# EAGLE board NES2FPGA (EAGLE 7.6.0)
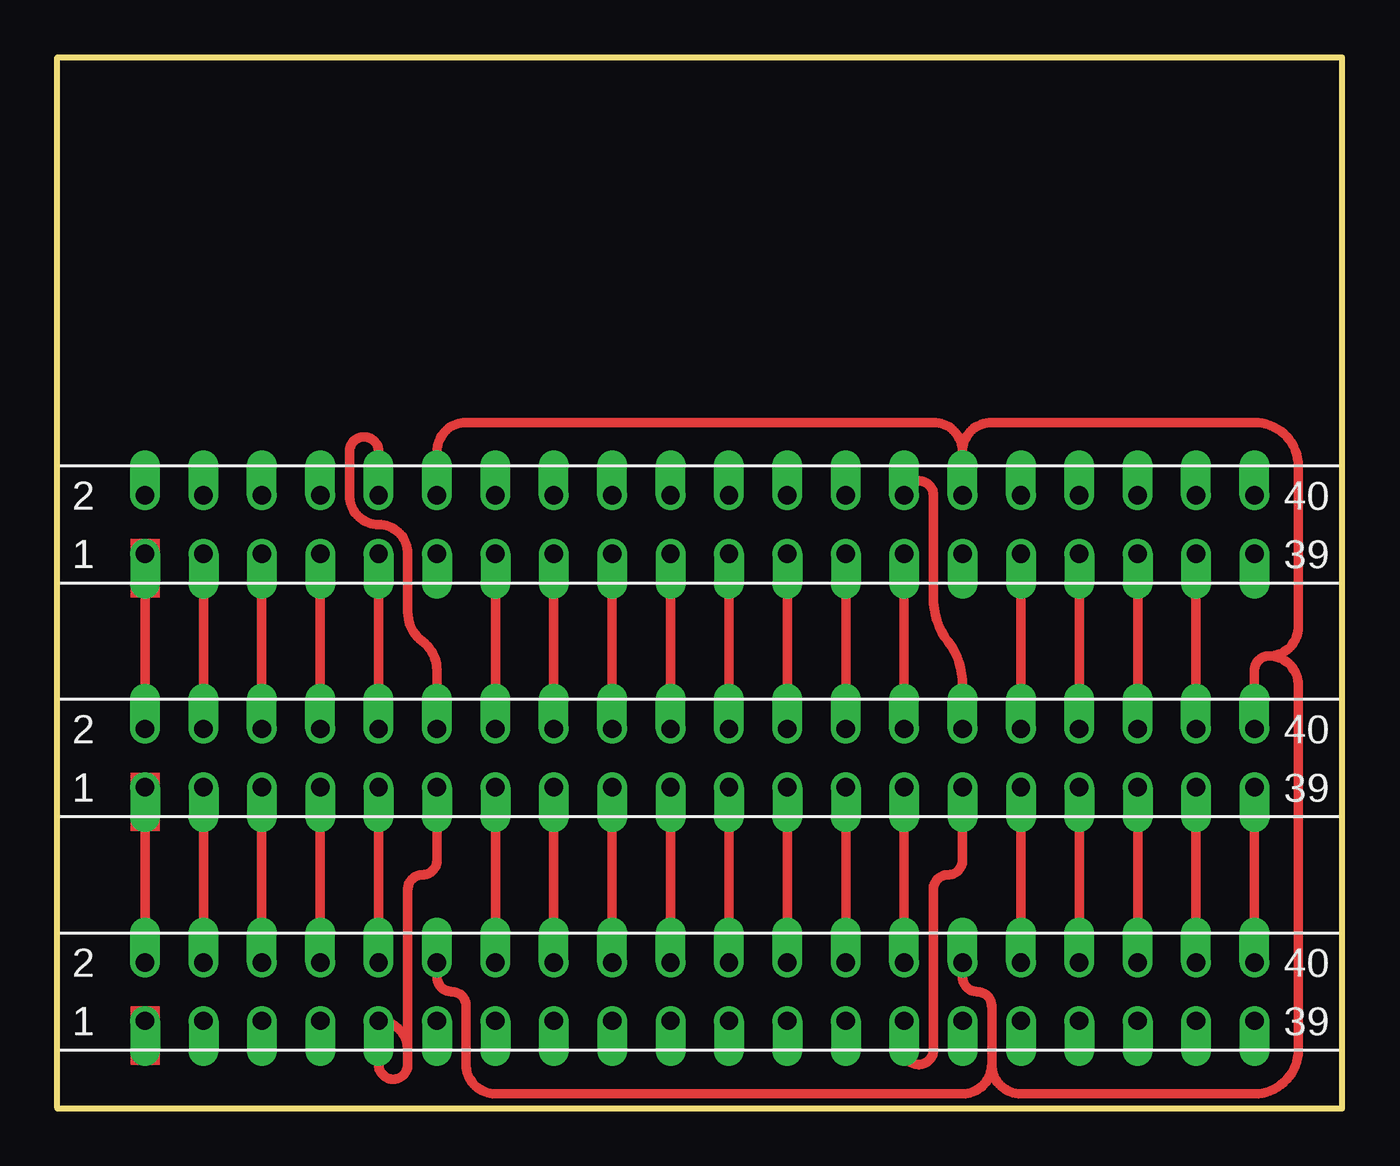
[diagram p0: board, top side]
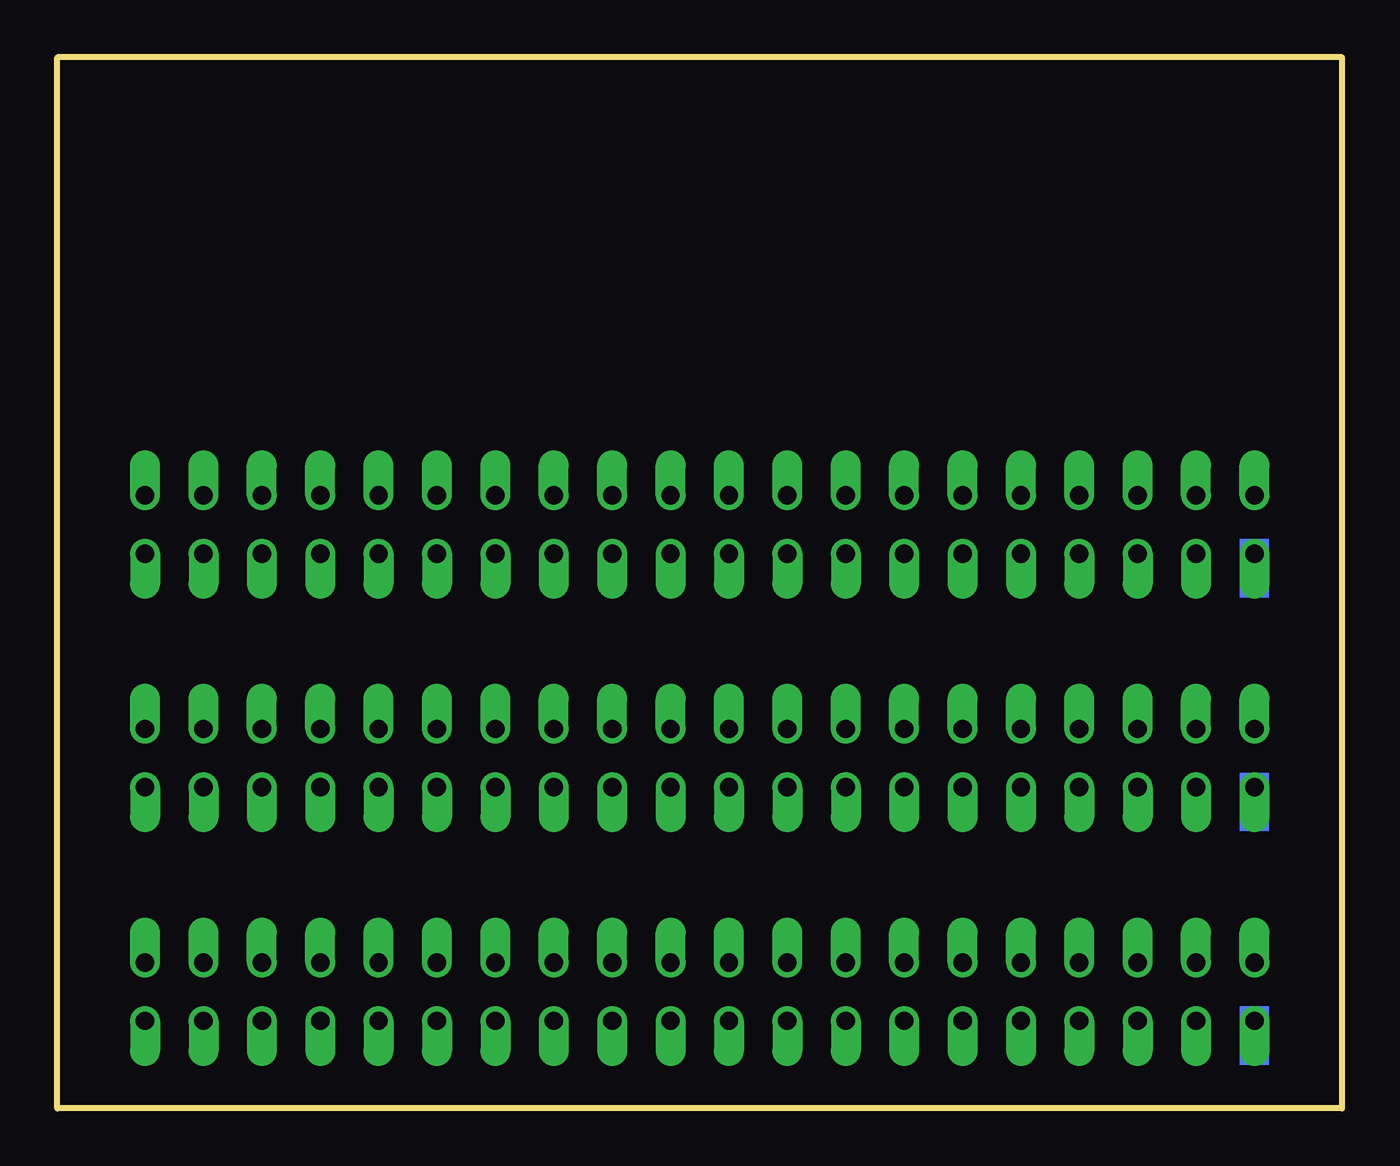
[diagram p1: board, bottom side, seen from below]

Size 55.88 x 45.72 mm. Coordinates in mm from the lower left corner, seen from the top.
Outline: 0,0 55.88,0 55.88,45.72 0,45.72 0,0
Copper layers (1*16): Top 0.035mm / dielectric 1.5mm / Bottom 0.035mm
Design rules "default": minimum track width 10mil, minimum drill 24mil, track to track 8mil, track to pad 8mil, pad to pad 8mil, via to via 8mil, smd to smd 8mil, copper to edge 40mil, drill to drill 8mil, minimum pad ring 10mil, minimum via ring 8mil, stop-mask expansion 4mil, vias tented up to drill 0mil, thermal gap 10mil

## Footprints (pad centres in the part's own frame; a part is rotated, then mirrored left to right if it is on the bottom)
40PINNER = drill 0.8 offset: P$1 -16.51,-1.27; P$2 -16.51,1.27; P$3 -13.97,-1.27; P$4 -13.97,1.27; P$5 -11.43,-1.27; P$6 -11.43,1.27; P$7 -8.89,-1.27; P$8 -8.89,1.27; P$9 -6.35,-1.27; P$10 -6.35,1.27; P$11 -3.81,-1.27; P$12 -3.81,1.27; P$13 -1.27,-1.27; P$14 -1.27,1.27; P$15 1.27,-1.27; P$16 1.27,1.27; P$17 3.81,-1.27; P$18 3.81,1.27; P$19 6.35,-1.27; P$20 6.35,1.27; P$21 8.89,-1.27; P$22 8.89,1.27; P$23 11.43,-1.27; P$24 11.43,1.27; P$25 13.97,-1.27; P$26 13.97,1.27; P$27 16.51,-1.27; P$28 16.51,1.27; P$29 19.05,-1.27; P$30 19.05,1.27; P$31 21.59,-1.27; P$32 21.59,1.27; P$33 24.13,-1.27; P$34 24.13,1.27; P$35 26.67,-1.27; P$36 26.67,1.27; P$37 29.21,-1.27; P$38 29.21,1.27; P$39 31.75,-1.27; P$40 31.75,1.27

## Placement (x,y rotation side)
E$1  [40PINNER]  20.32,5.08 0 top
E$2  [40PINNER]  20.32,25.4 0 top
E$3  [40PINNER]  20.32,15.24 0 top

## Library data of the parts
E$1-E$3 = NES

## Nets
S$1: E$1.P$12 E$1.P$30 E$2.P$12 E$2.P$30 E$3.P$40
S$2: E$1.P$9 E$3.P$11
S$3: E$1.P$27 E$3.P$29
S$4: E$2.P$10 E$3.P$12
S$5: E$2.P$28 E$3.P$30
S$6: E$1.P$2 E$3.P$1
S$7: E$1.P$4 E$3.P$3
S$8: E$1.P$6 E$3.P$5
S$9: E$1.P$8 E$3.P$7
S$10: E$1.P$10 E$3.P$9
S$11: E$1.P$14 E$3.P$13
S$12: E$1.P$16 E$3.P$15
S$13: E$1.P$18 E$3.P$17
S$14: E$1.P$20 E$3.P$19
S$15: E$1.P$22 E$3.P$21
S$16: E$1.P$24 E$3.P$23
S$17: E$1.P$26 E$3.P$25
S$18: E$1.P$28 E$3.P$27
S$19: E$1.P$32 E$3.P$31
S$20: E$1.P$34 E$3.P$33
S$21: E$1.P$36 E$3.P$35
S$22: E$1.P$38 E$3.P$37
S$23: E$1.P$40 E$3.P$39
S$24: E$2.P$1 E$3.P$2
S$25: E$2.P$3 E$3.P$4
S$26: E$2.P$5 E$3.P$6
S$27: E$2.P$7 E$3.P$8
S$28: E$2.P$9 E$3.P$10
S$29: E$2.P$13 E$3.P$14
S$30: E$2.P$15 E$3.P$16
S$31: E$2.P$17 E$3.P$18
S$32: E$2.P$19 E$3.P$20
S$33: E$2.P$21 E$3.P$22
S$34: E$2.P$23 E$3.P$24
S$35: E$2.P$25 E$3.P$26
S$36: E$2.P$27 E$3.P$28
S$37: E$2.P$31 E$3.P$32
S$38: E$2.P$33 E$3.P$34
S$39: E$2.P$35 E$3.P$36
S$40: E$2.P$37 E$3.P$38

## Tracks (layer width: path | path; a pad name or v marks a point on that pad's centre or on a via)
S$1
  Top 0.406: E$3.P$40 52.07,19.05 arc-90 52.7,19.68 | 52.7,19.68 arc90 53.98,20.95 53.98,27.94 arc90 52.07,29.84 40.64,29.84 arc90 39.37,28.57 | E$2.P$12 16.51,28.57 arc-90 17.78,29.84 38.1,29.84 arc-90 39.37,28.57 | 39.37,28.57 E$2.P$30 | 52.7,19.68 arc-90 53.98,18.41 53.98,2.54 arc-90 52.07,0.64 41.91,0.64 arc-90 40.64,1.91 | 40.64,1.91 40.64,4.45 arc90 40.01,5.08 arc-90 39.37,5.71 E$1.P$30 | E$1.P$12 16.51,5.71 arc90 17.14,5.08 arc-90 17.78,4.45 17.78,1.91 arc90 19.05,0.64 39.37,0.64 arc90 40.64,1.91
S$2
  Top 0.406: E$3.P$11 16.51,10.79 arc-90 15.88,10.16 arc90 15.24,9.53 15.24,2.54 | 15.24,2.54 15.24,1.91 arc-180 13.97,1.91 | 15.24,2.54 arc90 E$1.P$9
S$3
  Top 0.406: E$3.P$29 39.37,10.79 arc-90 38.73,10.16 arc90 38.1,9.53 38.1,2.54 arc-180 36.83,2.54 E$1.P$27
S$4
  Top 0.406: E$3.P$12 16.51,19.05 arc53 15.88,20.32 arc-53 15.24,21.59 15.24,24.13 arc90 13.97,25.4 arc-90 12.7,26.67 12.7,28.57 arc-180 13.97,28.57 E$2.P$10
S$5
  Top 0.406: E$3.P$30 39.37,18.41 arc37 38.73,20.32 arc-37 38.1,22.23 38.1,26.67 arc180 E$2.P$28
S$6
  Top 0.406: E$3.P$1 E$1.P$2
S$7
  Top 0.406: E$3.P$3 E$1.P$4
S$8
  Top 0.406: E$3.P$5 E$1.P$6
S$9
  Top 0.406: E$3.P$7 E$1.P$8
S$10
  Top 0.406: E$3.P$9 E$1.P$10
S$11
  Top 0.406: E$3.P$13 E$1.P$14
S$12
  Top 0.406: E$3.P$15 E$1.P$16
S$13
  Top 0.406: E$3.P$17 E$1.P$18
S$14
  Top 0.406: E$3.P$19 E$1.P$20
S$15
  Top 0.406: E$3.P$21 E$1.P$22
S$16
  Top 0.406: E$3.P$23 E$1.P$24
S$17
  Top 0.406: E$3.P$25 E$1.P$26
S$18
  Top 0.406: E$3.P$27 E$1.P$28
S$19
  Top 0.406: E$3.P$31 E$1.P$32
S$20
  Top 0.406: E$3.P$33 E$1.P$34
S$21
  Top 0.406: E$3.P$35 E$1.P$36
S$22
  Top 0.406: E$3.P$37 E$1.P$38
S$23
  Top 0.406: E$3.P$39 E$1.P$40
S$24
  Top 0.406: E$3.P$2 E$2.P$1
S$25
  Top 0.406: E$2.P$3 E$3.P$4
S$26
  Top 0.406: E$2.P$5 E$3.P$6
S$27
  Top 0.406: E$3.P$8 E$2.P$7
S$28
  Top 0.406: E$2.P$9 E$3.P$10
S$29
  Top 0.406: E$2.P$13 E$3.P$14
S$30
  Top 0.406: E$2.P$15 E$3.P$16
S$31
  Top 0.406: E$2.P$17 E$3.P$18
S$32
  Top 0.406: E$2.P$19 E$3.P$20
S$33
  Top 0.406: E$2.P$21 E$3.P$22
S$34
  Top 0.406: E$2.P$23 E$3.P$24
S$35
  Top 0.406: E$2.P$25 E$3.P$26
S$36
  Top 0.406: E$2.P$27 E$3.P$28
S$37
  Top 0.406: E$2.P$31 E$3.P$32
S$38
  Top 0.406: E$2.P$33 E$3.P$34
S$39
  Top 0.406: E$2.P$35 E$3.P$36
S$40
  Top 0.406: E$2.P$37 E$3.P$38